# Altium PCB infantry gimbal pcb.PcbDoc
Units mm, origin at the board's own origin, x right, y up, seen from the top; angles counter-clockwise.
Board outline 76 x 84 mm, 4 copper layers (SIGNAL, OTHER VCC, SHOOT VCC, GND), stack 0.604 mm thick; 16 components, 21 nets, 90 pads, 11 vias.
Unrouted connection lines stored in the file: 1.
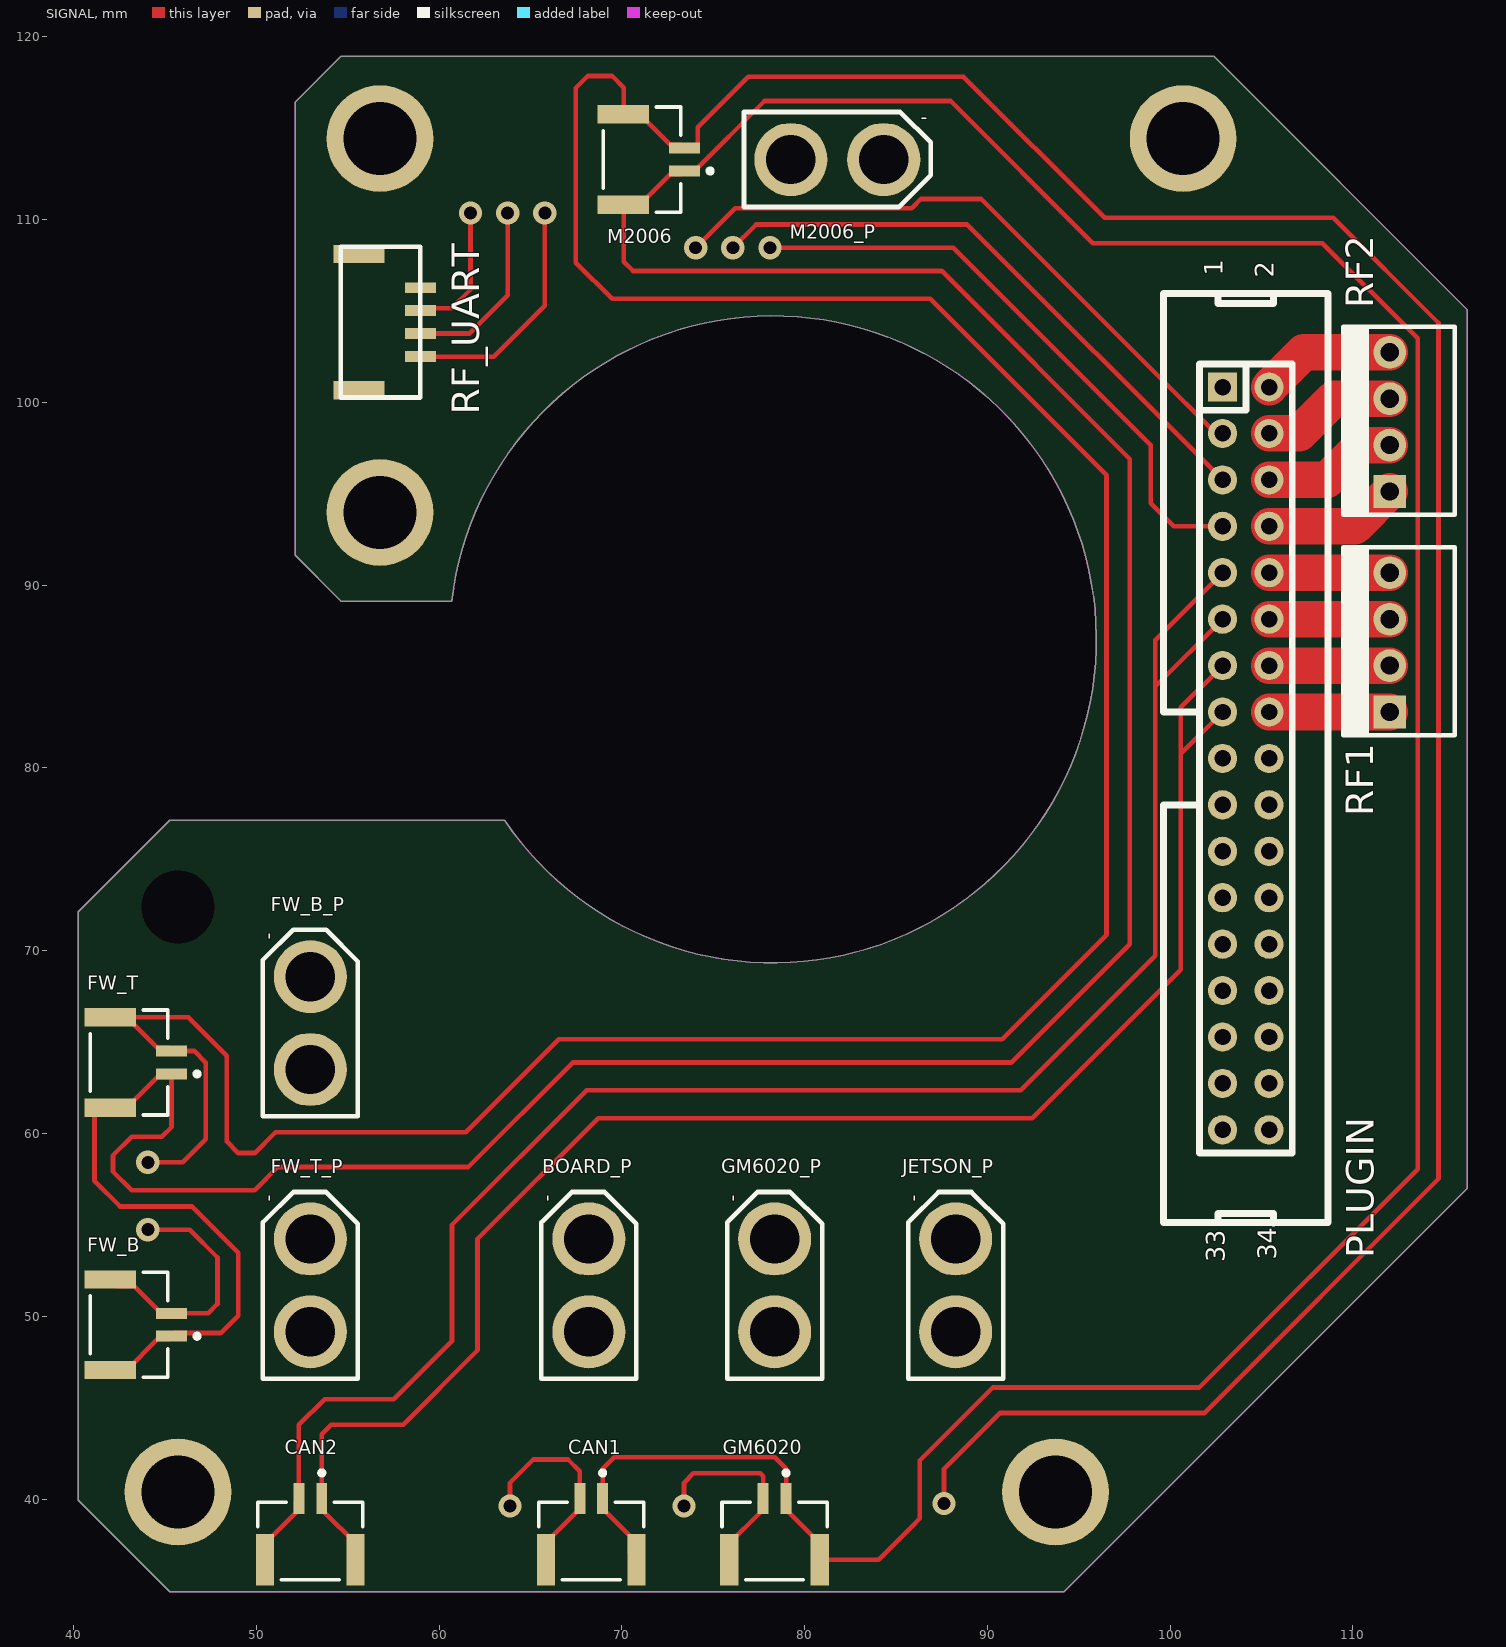
[diagram p0: SIGNAL view]
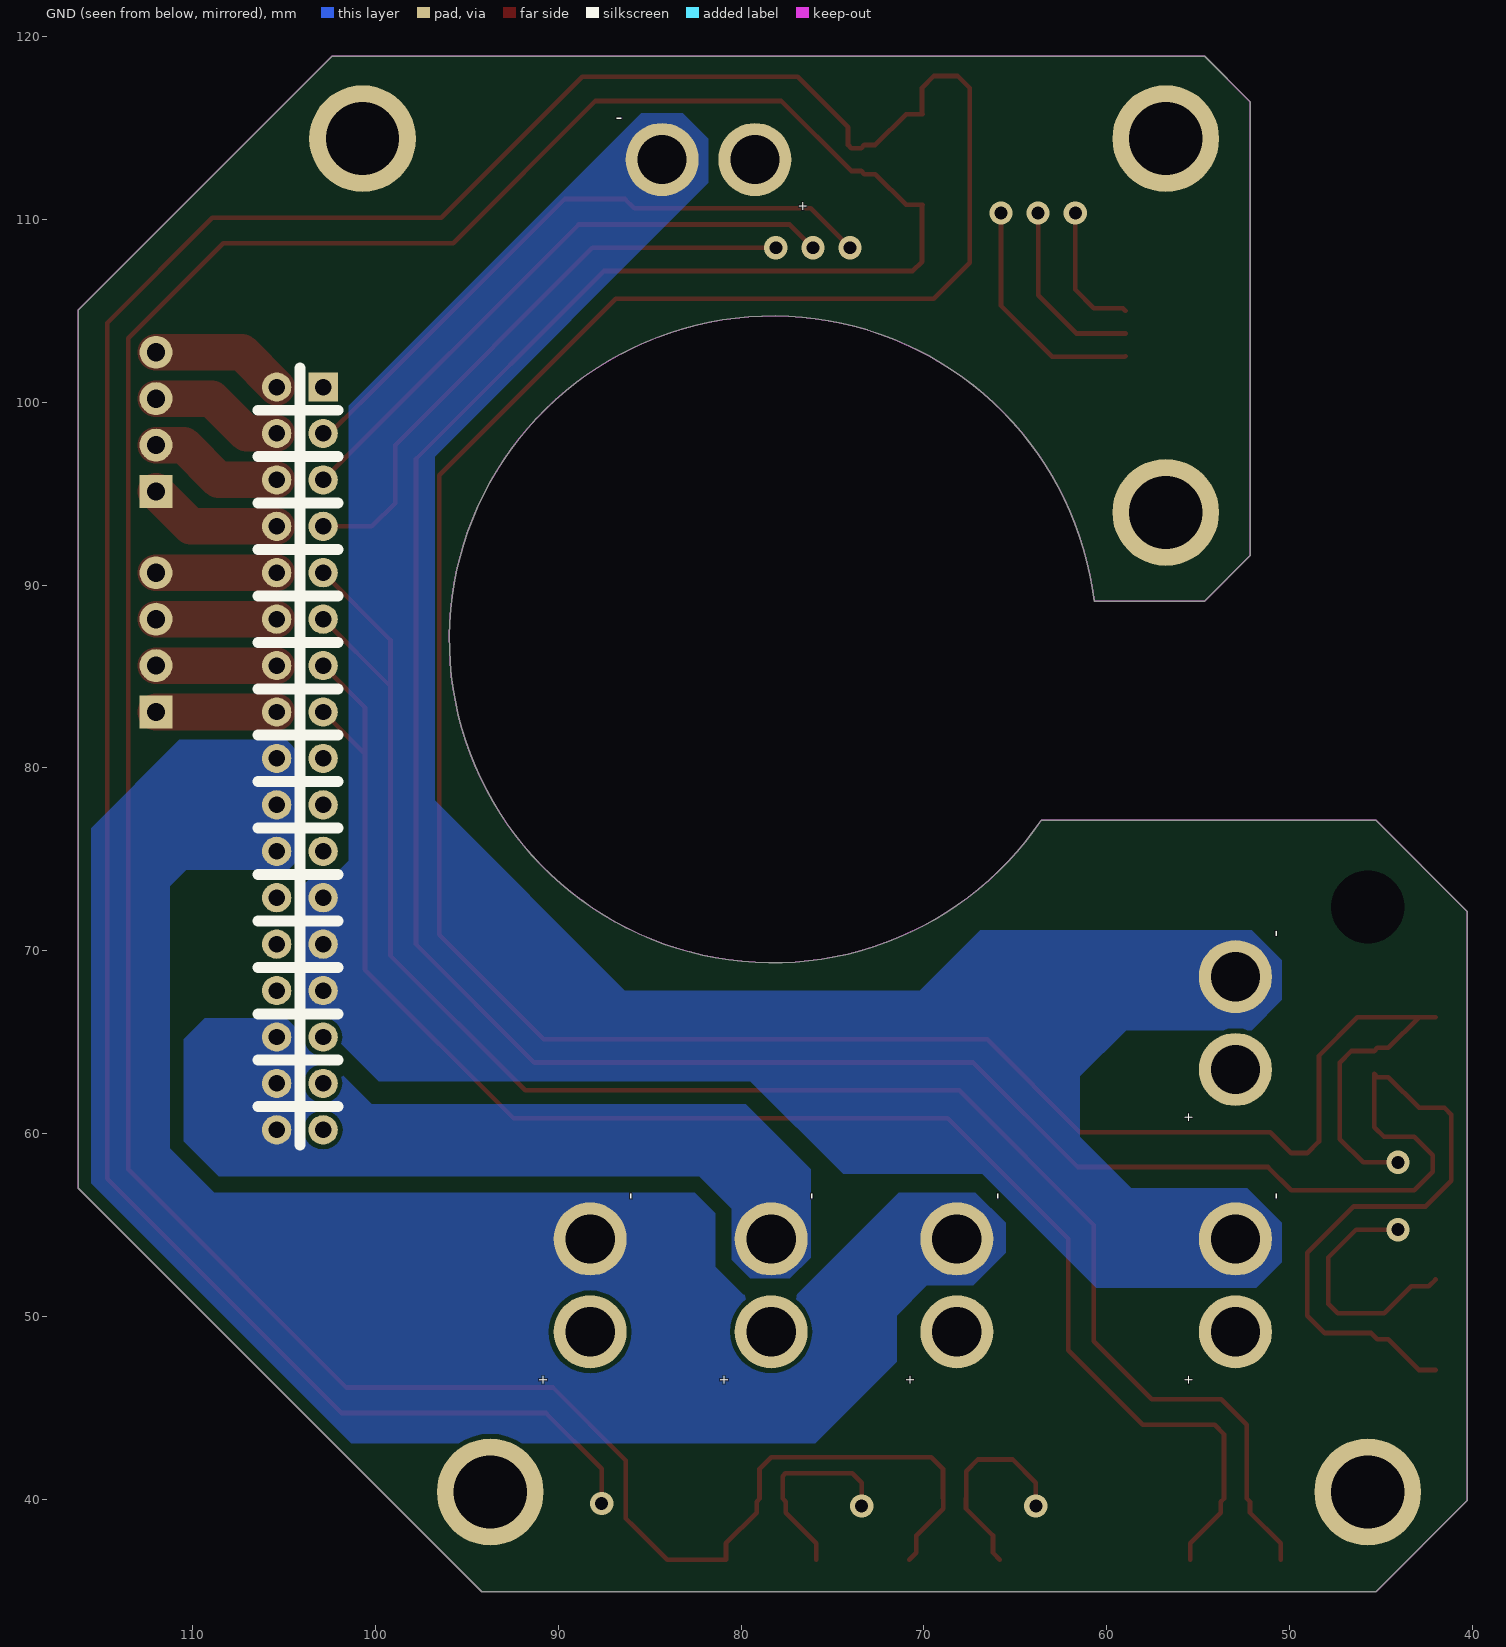
[diagram p1: GND view, seen from below]
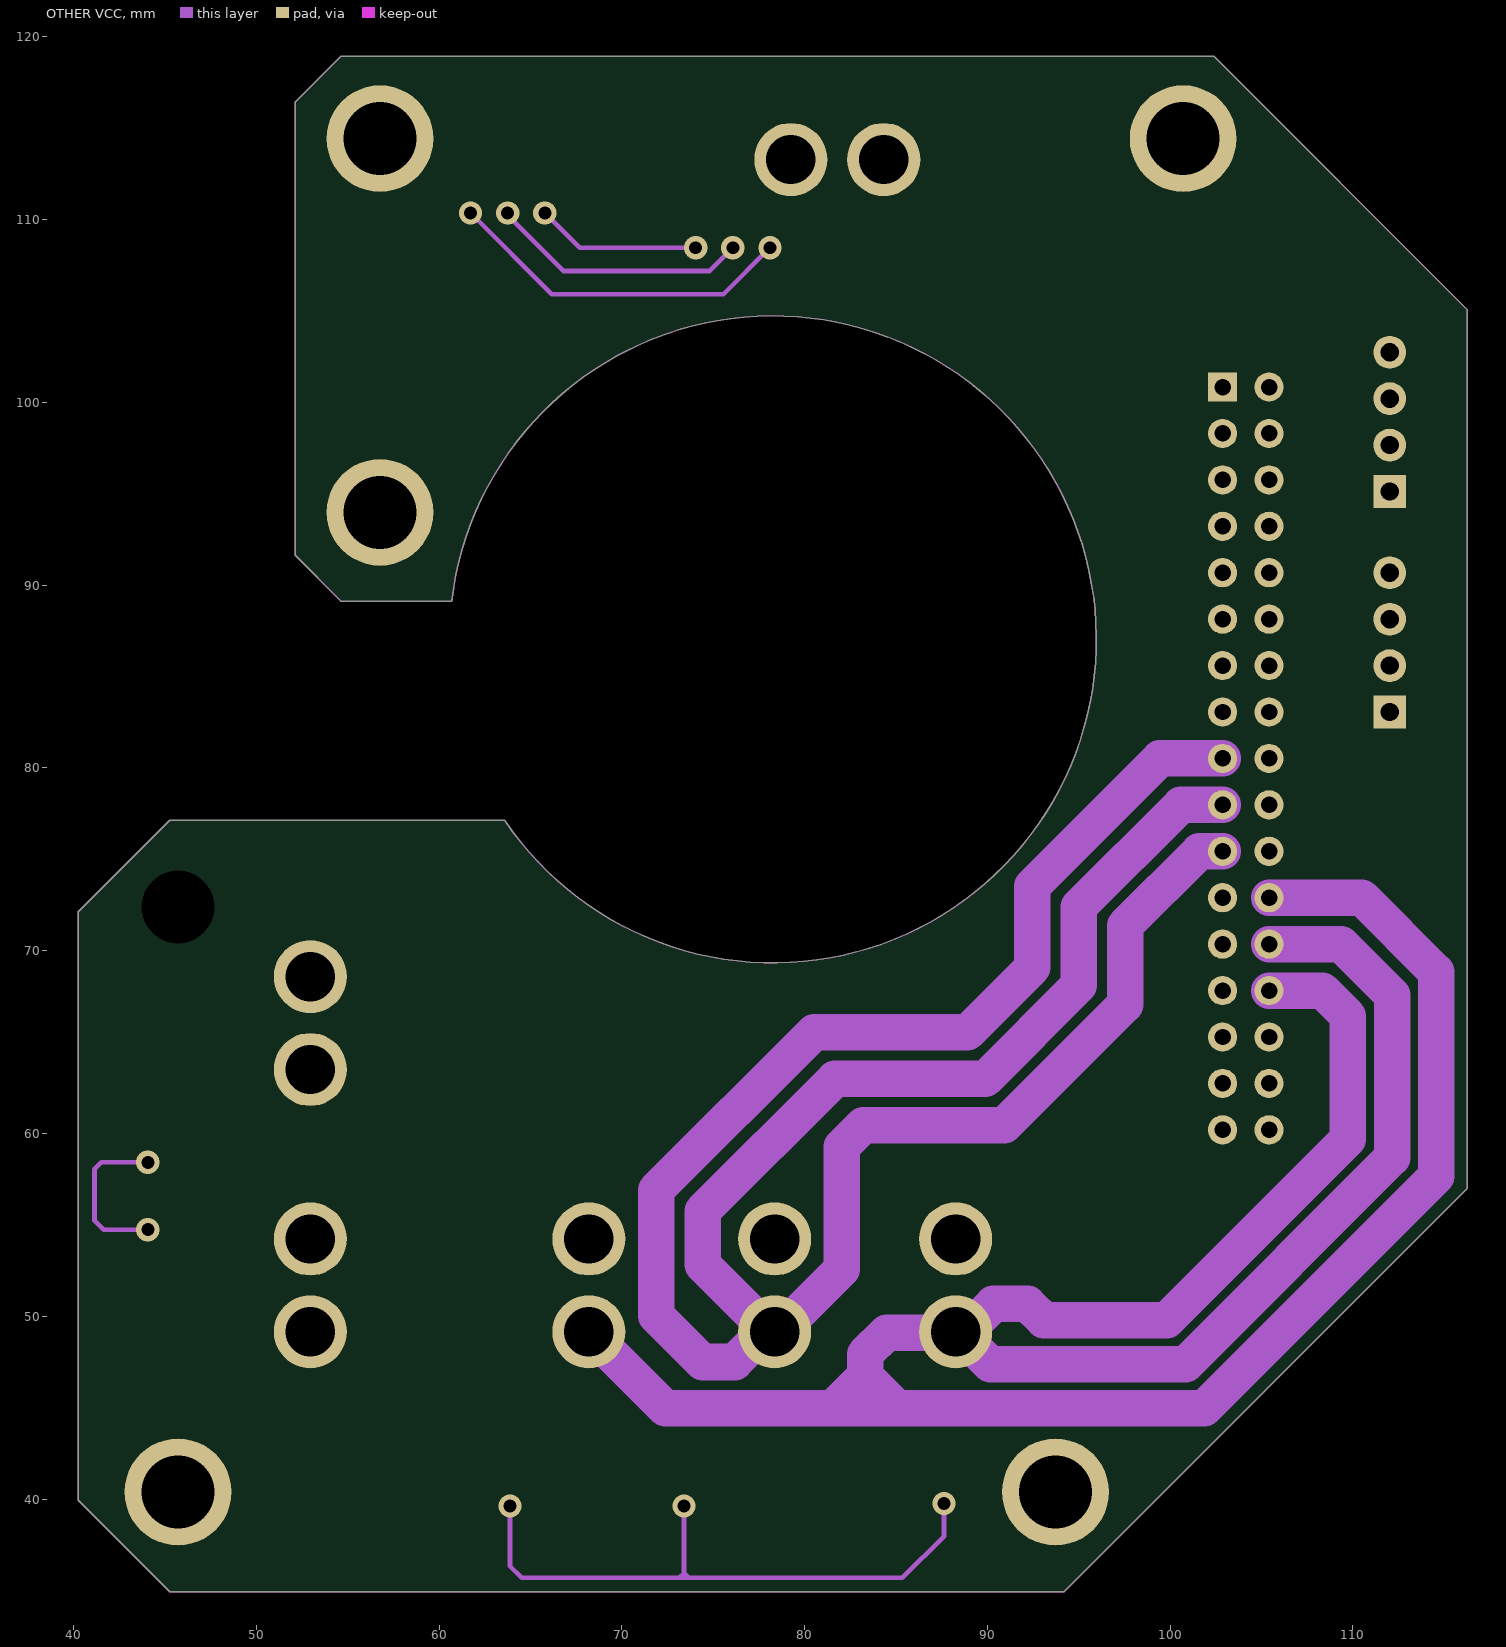
[diagram p2: OTHER VCC]
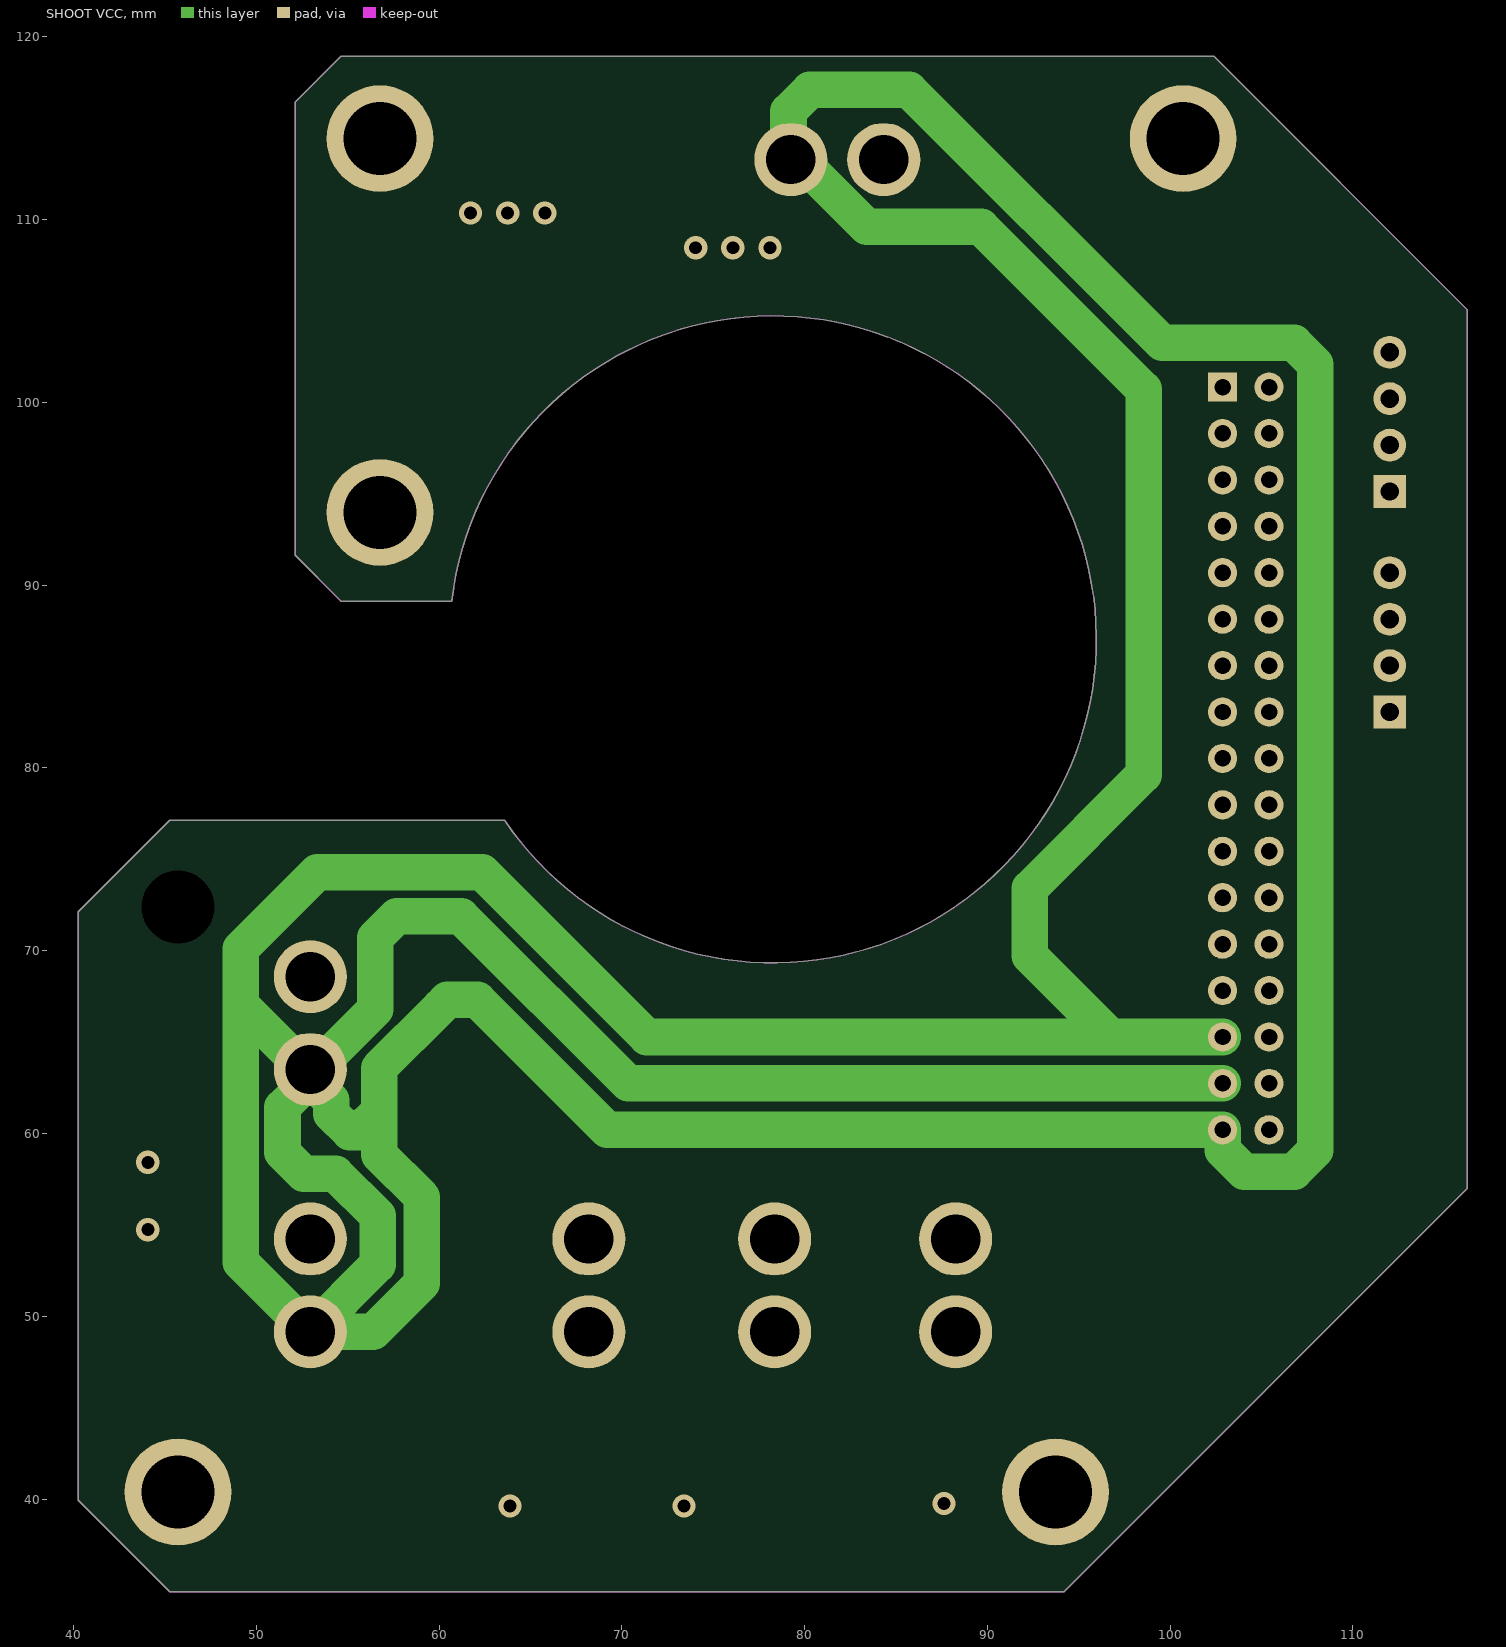
[diagram p3: SHOOT VCC]

## Layer stack, top to bottom
Top Solder: solder mask 0.611, Solder Resist, Dk 3.5
SIGNAL: signal copper 0.036
Dielectric 1: prepreg 0.071, PP-006, Dk 4.1
OTHER VCC: signal copper 0.035
Dielectric 2: dielectric 0.32, FR-4, Dk 4.8
SHOOT VCC: signal copper 0.035
Dielectric 3: prepreg 0.071, PP-006, Dk 4.1
GND: signal copper 0.036
Bottom Solder: solder mask 0.611, Solder Resist, Dk 3.5

## Board outline
40.265,39.931 40.265,72.131 45.265,77.131 63.593,77.131 ccw(c78.265,87.031) 60.69,89.131 54.637,89.131 52.137,91.631 52.137,116.431 54.637,118.931 102.394,118.931 116.265,105.06 116.265,57.002 94.194,34.931 45.265,34.931

## Design rules (kind name [scope] priority, off if disabled: settings)
Clearance [All] p1: gap=0.254 ignorepadtopadclearanceinfootprint=FALSE except(0: Arc-Hole Track-Hole SMDPad-Hole THPad-Hole Via-Hole Fill-Hole Poly-Hole Region-Hole Text-Hole)
PlaneConnect [All] p1: planeconnectstyle=Direct reliefexpansion=0.508 reliefentries=4 reliefconductorwidth=0.254 reliefairgap=0.254
PolygonConnect [All] p1: connectstyle=Direct reliefconductorwidth=0.254 reliefentries=4 polygonreliefangle="90 Angle" airgapwidth=0.254
RoomDefinition schematic [InComponentClass('schematic')] p1: confinementstyle=ConfineIn formatcopy=TRUE lockcomponents=FALSE outline 0,0 50.8,0 50.8,25.4 0,25.4
RoutingVias [All] p1: holewidth=0.711 width=1.27 viastyle="Through Hole" minholewidth=0.711 minwidth=1.27 maxholewidth=0.711 maxwidth=1.27
SolderMaskExpansion [All] p1: expansion=0.102 istentingtop=FALSE
Width [All] p1: maxlimit=10 minlimit=0.254 preferedwidth=2 toplayer_maxwidth=2 toplayer_prefwidth=0.254 midlayer1_maxwidth=2 midlayer2_maxwidth=2 bottomlayer_minwidth=2 minimp=50.000000 maximp=50.000000 favimp=50.000000
29 further rules are at their usual default settings.

## Components (designator, comment, footprint, x,y, rotation, side; value= is the part's Value field where it differs from the comment)
BOARD_P "XT PLUGIN" XT30-M 68.199,51.689 r90 top
CAN1 "CAN1" JST-BM02B-GHS-TBT_V 68.326,38.354 r180 top
CAN2 "CAN2" JST-BM02B-GHS-TBT_V 52.959,38.354 r180 top
FW_B "CAN1" JST-BM02B-GHS-TBT_V 43.688,49.533 r90 top
FW_B_P "XT PLUGIN" XT30-M 52.959,66.04 r90 top
FW_T "CAN1" JST-BM02B-GHS-TBT_V 43.688,63.884 r90 top
FW_T_P "XT PLUGIN" XT30-M 52.959,51.689 r90 top
GM6020 "CAN1" JST-BM02B-GHS-TBT_V 78.359,38.354 r180 top
GM6020_P "XT PLUGIN" XT30-M 78.359,51.689 r90 top
JETSON_P "XT PLUGIN" XT30-M 88.265,51.689 r90 top
M2006 "CAN1" JST-BM02B-GHS-TBT_V 71.755,113.284 r90 top
M2006_P "XT PLUGIN" XT30-M 81.788,113.284 r0 top
PLUGIN "Header 2X11" IDC2.54-LI-2x17P 102.87,100.838 r270 top
RF1 "HDR-1X4" KF2510-LI-4P 112.014,86.868 r90 top
RF2 "HDR-1X4" KF2510-LI-4P 112.014,98.933 r90 top
RF_UART "gh1.25 P4" GH1.25-4PIN 55.626,104.394 r270 top

## Footprints (in the part's own frame and the unit in brackets; to place one, negate y for a bottom-side part, rotate by r counter-clockwise, add the part's x,y. Pads: shape width x height; smd on the part's side, far side on the other; paste and mask are expansions set on the pad)
GH1.25-4PIN [mm]
  rect 1x2.8 smd: 1(-3.725,0) 4(3.725,0)
  rect 0.6x1.7 smd: 1(-1.875,3.35) 2(-0.625,3.35) 3(0.625,3.35) 4(1.875,3.35)
  silkscreen extent -4.13,-1 4.13,3.35
IDC2.54-LI-2x17P [mm] "34P简易牛角座"
  rect 1.6x1.6 hole 0.9: 1(0,0)
  round 1.6 hole 0.9: 2(0,2.54) 3(2.54,0) 4(2.54,2.54) 5(5.08,0) 6(5.08,2.54) 7(7.62,0) 8(7.62,2.54) 9(10.16,0) 10(10.16,2.54) 11(12.7,0) 12(12.7,2.54) 13(15.24,0) 14(15.24,2.54) 15(17.78,0) 16(17.78,2.54) 17(20.32,0) 18(20.32,2.54) 19(22.86,0) 20(22.86,2.54) 21(25.4,0) 22(25.4,2.54) 23(27.94,0) 24(27.94,2.54) 25(30.48,0) 26(30.48,2.54) 27(33.02,0) 28(33.02,2.54) 29(35.56,0) 30(35.56,2.54) 31(38.1,0) 32(38.1,2.54) 33(40.64,0) 34(40.64,2.54)
  silkscreen extent -5.11,-3.23 45.75,5.77, body extent -5.08,-3.08 45.72,5.77, height 9.17
JST-BM02B-GHS-TBT_V [mm] "Connector, 2-Leads, Body 5.75x4.25mm, Pitch 1.25mm"
  rect 0.6x1.7 smd: 1(-0.625,-1.675) 2(0.625,-1.675)
  rect 1x2.8 smd: MP1(-2.475,1.675) MP2(2.475,1.675)
  silkscreen extent -2.88,-3.2 2.88,2.78, body extent -2.88,-2.17 2.87,2.78, height 4.21
KF2510-LI-4P [mm] "接插件/2A"
  rect 1.8x1.8 hole 1: 1(-3.81,0)
  round 1.8 hole 1: 2(-1.27,0) 3(1.27,0) 4(3.81,0)
  silkscreen extent -5.08,-3.56 5.21,2.54, body extent -5.08,-3.5 5.08,2.4, height 11.05
XT30-M [mm]
  round 4 hole 2.7: 1(-2.54,0) 2(2.54,0)
  silkscreen extent -5.1,-2.6 5.11,2.6, body extent -5.18,-2.8 5.02,2.8, height 10.66

## Part data
CAN1 CAN2 FW_B FW_T GM6020 M2006: library part CMP-2000-05957-1, "Disconnectable Crimp Style Connector, Pitch 1.25 mm, 1 x 2 Position, Height 4.05 mm, -25 to 85 degC, RoHS, Tape and Reel", Color=Natural, Manufacturer=JST-Sales-America-Inc., Package Description="Disconnectable Crimp Style Connector, Pitch 1.25 mm, 1 x 2 Position, Height 4.05 mm", Package Reference=BM02B-GHS-TBT, Category=Connectors,Interconnects, Connector Type=Header,Shrouded, Contact Finish=Tin, Contact Finish Thickness=-, Contact Mating Length=-, Contact Type=OuterShroudContact, Datasheet URL=http://www.jst-mfg.com/product/pdf/eng/eGH.pdf, Datasheet Version=05/2016, Family=RectangularConnectors-Headers,MalePins, Fastening Type=LockingRamp, Features=SolderRetention, Manufacturer URL=http://www.jst.com/home2.html, Mounting Technology=SurfaceMount, Mounting Type=SurfaceMount, Number of Positions=2, Number of Positions Loaded=All, Number of Rows=1, Packaging=Digi-Reel®, Pitch="0.049\"(1.25mm)", Row Spacing=-, Series=GH, Termination=Solder
PLUGIN: library part "Header 17X2", "17*2P接插件", BOM名称=17*2P接插件, 学习资源=https://shop463601444.taobao.com, 版权归属="封装库来自淘宝 ID：黄晶宝石"
RF1 RF2: library part "Header 4", "4P接插件", BOM名称=4P接插件, 学习资源=https://shop463601444.taobao.com, 版权归属="封装库来自淘宝 ID：黄晶宝石"

## Free pads (board coordinates)
  round 5.842 hole 4: 7(45.72,40.386) 8(93.726,40.386) 9(56.769,93.98) 10(56.769,114.427) 11(100.711,114.427)
  round 3.81 hole 4: 12(45.72,72.39)

## Via types
v1: diameter 1.27/1.27/1.27/1.27 (per signal layer), hole 0.711, SIGNAL to GND, 6 vias
v2: diameter 1.27, hole 0.711, SIGNAL to GND, 5 vias

## Nets (pads, with @x,y where several pads share a name; then routed paths per layer and width w, separated by ;. In a path a pad name is that pad's centre, name@x,y a point inside that pad or via, vN(x,y) a via of type N, cw(c..) or ccw(c..) an arc to the next point about the centre after c; other vN are vias at no path point)
AMMO_DC: FW_B_P.1 FW_T_P.1 M2006_P.1 PLUGIN.29 PLUGIN.31 PLUGIN.33 | length 395.3
  SHOOT VCC w2: PLUGIN.31 70.358,62.738 61.214,71.882 57.687,71.882 56.515,70.71 56.515,66.802 53.213,63.5 FW_B_P.1 ; PLUGIN.29 96.774,65.278 ; 49.149,67.056 49.149,52.959 FW_T_P.1 ; 49.149,67.056 49.149,70.104 53.34,74.295 62.357,74.295 71.374,65.278 96.774,65.278 ; 49.149,67.056 52.705,63.5 FW_B_P.1 ; FW_T_P.1 56.642,52.832 56.642,55.499 54.345,57.796 52.607,57.796 51.435,58.968 51.435,61.435 FW_B_P.1@52.959,62.959 ; FW_T_P.1 56.388,49.149 59.055,51.816 59.055,56.515 56.719,58.851 56.719,61.214 ; FW_B_P.1@52.959,62.959 FW_B_P.1 ; FW_B_P.1@52.959,62.959 54.102,61.816 54.102,61.087 55.118,60.071 55.576,60.071 56.719,61.214 ; 56.719,61.214 56.719,63.577 60.071,66.929 60.449,67.307 62.106,67.307 69.215,60.198 PLUGIN.33 102.87,59.084 104.042,57.912 106.778,57.912 107.95,59.084 107.95,102.079 106.778,103.251 99.568,103.251 85.725,117.094 80.293,117.094 79.121,115.922 79.121,113.411 M2006_P.1 79.726,113.284 83.409,109.601 89.662,109.601 98.552,100.711 98.552,79.629 92.329,73.406 92.329,69.723 96.774,65.278
AMMO_GND: FW_B_P.2 FW_T_P.2 M2006_P.2 PLUGIN.23 PLUGIN.25 PLUGIN.27
CAN1_H: CAN1.2 CAN1.MP2 FW_B.2 FW_B.MP2 FW_T.2 FW_T.MP2 GM6020.2 GM6020.MP2 M2006.2 M2006.MP2 | length 367.1
  SIGNAL w0.254: FW_B.MP2 42.386,51.635 43.336,51.635 44.813,50.158 FW_B.2 45.37,50.165 47.371,50.165 47.879,50.673 47.879,53.213 46.391,54.701 ; FW_T.MP2 FW_T.MP2@42.913,66.359 ; v2(44.069,54.737) 46.355,54.737 ; v2(44.069,58.42) 45.974,58.42 47.244,59.69 47.244,63.881 46.609,64.516 45.37,64.516 FW_T.2 45.19,64.682 44.59,64.682 FW_T.MP2@42.913,66.359 ; v2(63.881,39.624) 63.881,40.894 65.151,42.164 67.056,42.164 67.691,41.529 67.691,40.039 CAN1.2 67.701,39.479 66.224,38.002 66.224,37.052 CAN1.MP2 ; v2(73.406,39.624) 73.406,40.894 73.914,41.402 77.585,41.402 77.734,41.253 GM6020.2 77.561,39.856 77.561,39.256 75.884,37.579 GM6020.MP2 ; v2(87.63,39.751) 87.63,41.656 90.678,44.704 101.854,44.704 114.681,57.531 114.681,104.34 108.93,110.091 96.411,110.091 88.691,117.811 76.917,117.811 74.153,115.047 74.153,114.082 73.98,113.909 M2006.2 73.257,114.082 72.657,114.082 70.98,115.759 M2006.MP2 70.104,115.783 70.104,117.221 69.469,117.856 68.146,117.856 67.487,117.197 67.487,107.646 69.469,105.664 86.868,105.664 96.52,96.012 96.52,70.866 90.805,65.151 66.548,65.151 61.468,60.071 51.054,60.071 49.911,58.928 49.022,58.928 48.387,59.563 48.387,64.262 46.29,66.359 FW_T.MP2@42.913,66.359
  OTHER VCC w0.254: v2(44.069,54.737) 41.656,54.737 41.148,55.245 41.148,58.039 41.529,58.42 v2(44.069,58.42) ; v2(63.881,39.624) 63.881,36.322 64.516,35.687 73.152,35.687 ; v2(73.406,39.624) 73.406,35.941 ; v2(87.63,39.751) 87.63,37.973 85.344,35.687 73.66,35.687 ; 73.152,35.687 73.66,35.687 ; 73.152,35.687 73.406,35.941 ; 73.406,35.941 73.66,35.687
CAN1_L: CAN1.1 CAN1.MP1 FW_B.1 FW_B.MP1 FW_T.1 FW_T.MP1 GM6020.1 GM6020.MP1 M2006.1 M2006.MP1 | length 323.1
  SIGNAL w0.254: FW_B.MP1 42.913,47.058 44.59,48.735 45.19,48.735 FW_B.1 45.536,49.081 48.065,49.081 49.022,50.038 49.022,53.467 46.482,56.007 42.545,56.007 41.148,57.404 41.148,61.036 41.521,61.409 42.913,61.409 44.59,63.086 45.19,63.086 FW_T.1 45.363,60.349 44.831,59.817 43.18,59.817 42.164,58.801 42.164,57.912 43.18,56.896 49.911,56.896 51.181,58.166 61.595,58.166 67.31,63.881 91.313,63.881 97.79,70.358 97.79,96.901 87.503,107.188 70.612,107.188 70.104,107.696 70.104,110.785 M2006.MP1 70.98,110.809 72.657,112.486 73.257,112.486 M2006.1 73.98,112.659 77.806,116.485 87.985,116.485 95.758,108.712 108.331,108.712 113.538,103.505 113.538,58.039 101.6,46.101 90.297,46.101 86.306,42.11 86.306,38.935 85.852,38.481 84.05,36.679 GM6020.MP1 80.834,37.579 79.157,39.256 79.157,39.856 GM6020.1 78.994,40.039 78.994,41.656 78.359,42.291 69.596,42.291 68.961,41.656 68.961,40.039 CAN1.1 68.951,39.479 70.428,38.002 70.428,37.052 CAN1.MP1
CAN2_H: CAN2.2 CAN2.MP2 PLUGIN.9 PLUGIN.11 | length 97
  SIGNAL w0.254: CAN2.MP2 50.484,37.579 52.161,39.256 52.161,39.856 CAN2.2 52.334,44.059 53.741,45.466 57.531,45.466 60.706,48.641 60.706,54.991 68.072,62.357 91.821,62.357 99.187,69.723 99.187,84.455 ; PLUGIN.11 99.187,84.455 ; PLUGIN.9 99.187,86.995 99.187,84.455
CAN2_L: CAN2.1 CAN2.MP1 PLUGIN.13 PLUGIN.15 | length 89.6
  SIGNAL w0.254: CAN2.MP1 55.434,37.579 53.757,39.256 53.757,39.856 CAN2.1 53.584,43.551 54.102,44.069 58.039,44.069 62.103,48.133 62.103,54.229 68.707,60.833 92.456,60.833 100.584,68.961 100.584,80.772 ; PLUGIN.15 100.584,80.772 ; PLUGIN.13 100.584,83.312 100.584,80.772
GMB_DC: GM6020_P.1 PLUGIN.17 PLUGIN.19 PLUGIN.21 | length 148.6
  OTHER VCC w2: PLUGIN.21 101.6,75.438 97.536,71.374 97.536,67.056 90.932,60.452 83.214,60.452 82.042,59.28 82.042,52.578 78.613,49.149 GM6020_P.1 GM6020_P.1@78.105,49.149 ; PLUGIN.19 100.584,77.978 94.996,72.39 94.996,68.099 89.889,62.992 81.661,62.992 74.422,55.753 74.422,52.832 GM6020_P.1@78.105,49.149 ; PLUGIN.17 99.441,80.518 92.456,73.533 92.456,69.088 88.9,65.532 80.518,65.532 71.882,56.896 71.882,50.038 74.422,47.498 76.167,47.498 77.818,49.149 GM6020_P.1@78.105,49.149
GMB_GND: GM6020_P.2 PLUGIN.30 PLUGIN.32 PLUGIN.34
MPC_DC: BOARD_P.1 JETSON_P.1 PLUGIN.24 PLUGIN.26 PLUGIN.28 | length 171.2
  OTHER VCC w2: BOARD_P.1 72.39,44.958 81.534,44.958 ; PLUGIN.28 108.331,67.818 109.728,66.421 109.728,59.69 99.822,49.784 93.091,49.784 92.202,50.673 90.33,50.673 88.806,49.149 JETSON_P.1@88.392,49.149 ; PLUGIN.26 109.347,70.358 112.141,67.564 112.141,58.674 100.838,47.371 90.17,47.371 JETSON_P.1@88.392,49.149 ; PLUGIN.24 110.49,72.898 114.554,68.834 114.554,57.658 101.854,44.958 85.09,44.958 ; 81.534,44.958 85.09,44.958 ; 81.534,44.958 83.312,46.736 ; 83.312,46.736 85.09,44.958 ; 83.312,46.736 83.312,47.926 84.484,49.097 88.213,49.097 JETSON_P.1 JETSON_P.1@88.392,49.149
MPC_GND: BOARD_P.2 JETSON_P.2 PLUGIN.18 PLUGIN.20 PLUGIN.22
Referee_1A: PLUGIN.10 RF1.4 | length 6.6
  SIGNAL w2: PLUGIN.10 RF1.4
Referee_1B: PLUGIN.12 RF1.3 | length 6.6
  SIGNAL w2: PLUGIN.12 RF1.3
Referee_1C: PLUGIN.14 RF1.2 | length 6.6
  SIGNAL w2: PLUGIN.14 RF1.2
Referee_1D: PLUGIN.16 RF1.1 | length 6.6
  SIGNAL w2: PLUGIN.16 RF1.1
Referee_2A: PLUGIN.2 RF2.4 | length 7.4
  SIGNAL w2: PLUGIN.2 107.315,102.743 RF2.4
Referee_2B: PLUGIN.4 RF2.3 | length 7.4
  SIGNAL w2: PLUGIN.4 107.061,98.298 108.966,100.203 RF2.3
Referee_2C: PLUGIN.6 RF2.2 | length 7.4
  SIGNAL w2: PLUGIN.6 108.585,95.758 110.49,97.663 RF2.2
Referee_2D: PLUGIN.8 RF2.1 | length 7.4
  SIGNAL w2: PLUGIN.8 110.109,93.218 RF2.1
UART_GND: PLUGIN.7 RF_UART.2 | length 59.6
  SIGNAL w0.254: RF_UART.2 59.113,105.156 60.706,105.156 61.722,106.172 v1(61.722,110.363) ; v1(78.105,108.458) 88.138,108.458 98.933,97.663 98.933,94.488 100.203,93.218 PLUGIN.7
  OTHER VCC w0.254: v1(61.722,110.363) 66.167,105.918 75.565,105.918 v1(78.105,108.458)
UART_RX: PLUGIN.3 RF_UART.4 | length 57.4
  SIGNAL w0.254: RF_UART.4@58.976,102.519 59.006,102.489 62.992,102.489 65.786,105.283 v1(65.786,110.363) ; v1(74.041,108.458) 76.2,110.617 85.852,110.617 86.36,111.125 89.662,111.125 100.838,99.949 100.855,99.949 102.506,98.298 PLUGIN.3
  OTHER VCC w0.254: v1(65.786,110.363) 67.691,108.458 v1(74.041,108.458)
UART_Tx: PLUGIN.5 RF_UART.3 | length 57.5
  SIGNAL w0.254: RF_UART.3 61.674,103.769 63.754,105.849 v1(63.754,110.363) ; v1(76.073,108.458) 77.343,109.728 88.9,109.728 PLUGIN.5
  OTHER VCC w0.254: v1(63.754,110.363) 63.754,110.236 66.802,107.188 74.803,107.188 v1(76.073,108.458)
pads on no net: PLUGIN.1 RF_UART.1

## Polygon pours and split planes (outlines as drawn)
MPC_GND on GND "MPC_GND_L04_P006" (solid, pour order 6): 82.55,56.769 81.407,55.626 81.407,52.705 79.883,51.181 76.962,51.181 71.374,56.769 67.183,56.769 65.532,55.118 65.532,53.467 67.31,51.689 69.85,51.689 71.501,50.038 71.501,47.498 75.946,43.053 101.346,43.053 115.57,57.277 115.57,76.708 110.744,81.534 104.902,81.534 104.14,80.772 104.14,75.057 104.775,74.422 110.363,74.422 111.252,73.533 111.252,59.182 108.839,56.769
AMMO_GND on GND "AMMO_GND_L04_P008" (solid, pour order 8): 52.07,71.12 50.419,69.469 50.419,67.31 52.07,65.659 58.928,65.659 61.468,63.119 61.468,59.817 58.653,57.002 52.303,57.002 50.419,55.118 50.419,52.959 51.816,51.562 60.579,51.562 66.802,57.785 74.422,57.785 79.502,62.865 99.822,62.865 104.013,67.056 104.013,73.533 103.378,74.168 102.235,74.168 101.473,74.93 101.473,99.822 85.471,115.824 83.185,115.824 81.788,114.427 81.788,112.014 96.774,97.028 96.774,78.232 86.36,67.818 70.231,67.818 66.929,71.12
GMB_GND on GND "GMB_GND_L04_P000" (solid, pour order 0): 76.2,53.213 77.343,52.07 79.502,52.07 80.518,53.086 80.518,55.88 82.296,57.658 108.585,57.658 110.49,59.563 110.49,65.151 109.347,66.294 104.902,66.294 100.203,61.595 79.756,61.595 76.2,58.039

## Keep-outs
Keep-Out Layer:
  the board outline again, w0.013

## Silkscreen, mask and mechanical layers (free items; w line width, h text height)
Mechanical 1:
  the board outline again, w0.2

## Text inside footprints (layer, text, board x,y; h text height)
BOARD_P: Bottom Overlay "-" at 66.243,56.769 h0.76 r90; Bottom Overlay "+" at 70.974,46.809 h0.51 r90; Top Overlay "-" at 66.243,56.261 h0.76 r90
FW_B_P: Bottom Overlay "+" at 55.734,61.16 h0.51 r90; Bottom Overlay "-" at 51.003,71.12 h0.76 r90; Top Overlay "-" at 51.003,70.612 h0.76 r90
FW_T_P: Bottom Overlay "-" at 51.003,56.769 h0.76 r90; Bottom Overlay "+" at 55.734,46.809 h0.51 r90; Top Overlay "-" at 51.003,56.261 h0.76 r90
GM6020_P: Bottom Overlay "-" at 76.403,56.769 h0.76 r90; Bottom Overlay "+" at 81.134,46.809 h0.51 r90; Top Overlay "-" at 76.403,56.261 h0.76 r90
JETSON_P: Bottom Overlay "-" at 86.309,56.769 h0.76 r90; Bottom Overlay "+" at 91.04,46.809 h0.51 r90; Top Overlay "-" at 86.309,56.261 h0.76 r90
M2006_P: Bottom Overlay "-" at 86.868,115.24 h0.76; Bottom Overlay "+" at 76.908,110.509 h0.51; Top Overlay "-" at 86.36,115.24 h0.76
PLUGIN: Top Overlay "2" at 105.664,106.807 h1.02 r90; Top Overlay "1" at 102.87,106.934 h1.02 r90; Top Overlay "34" at 105.791,53.086 h1.02 r90; Top Overlay "33" at 102.997,52.959 h1.02 r90